# EAGLE board SpectroSlave (EAGLE 7.1.0)
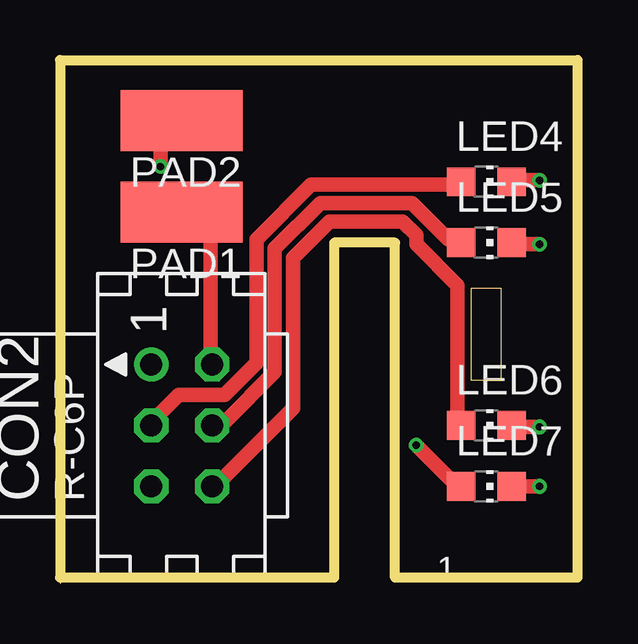
[diagram p0: board, top side]
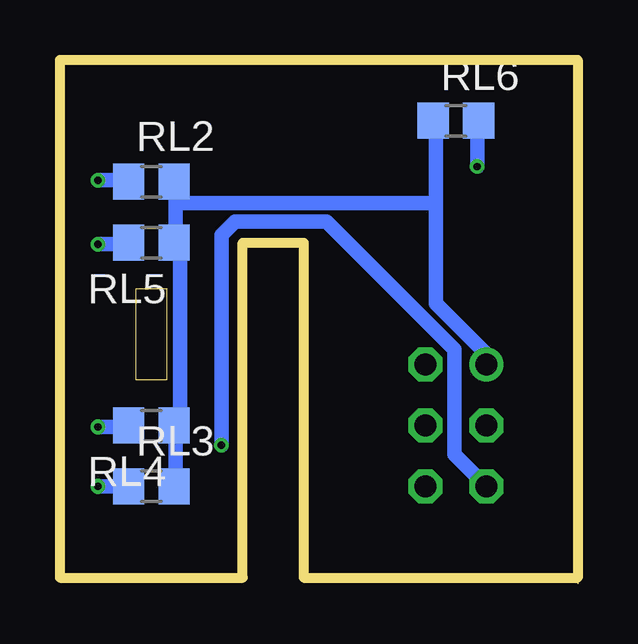
[diagram p1: board, bottom side, seen from below]

Size 21.59 x 21.84 mm. Coordinates in mm from the lower left corner, seen from the top.
Outline: 0,0.25 0,0
Outline: 0,0.25 0,21.84 21.59,21.84 21.59,0.25 13.97,0.25 13.97,14.22 11.43,14.22 11.43,0.25 0,0.25
Copper layers (1*16): Top 0.035mm / dielectric 1.5mm / Bottom 0.035mm
Design rules "Fusion_eagle_rule_v1.1": minimum track width 6mil, minimum drill 12mil, track to track 6mil, track to pad 6mil, pad to pad 6mil, via to via 6mil, smd to smd 0mil, copper to edge 10mil, drill to drill 10mil, minimum pad ring 10mil, minimum via ring 6mil, stop-mask expansion 2mil, vias tented up to drill 100mil, thermal gap 10mil
Net classes: 0 default: width 0.61 mm; 1 power: width 0.61 mm; 2 VIN: width 0.61 mm; 3 fine: width 0.61 mm; 4 aref: width 0.61 mm

## Footprints (pad centres in the part's own frame; a part is rotated, then mirrored left to right if it is on the bottom)
CON06L = drill 0.914: 1 2.54,1.27 | drill 0.914 octagon: 2 2.54,-1.27; 3 0,1.27; 4 0,-1.27; 5 -2.54,1.27; 6 -2.54,-1.27
CHIP-LED0805 = smd 1.2 x 1.2: A 0,-1.05; C 0,1.05
SMD2,54-5,08 = smd 2.54 x 5.08: 1 0,0
R0805 = smd 1.3 x 1.5: 1 -0.95,0; 2 0.95,0

## Placement (x,y rotation side)
CON2  [CON06L]  5.08,6.6 90 top
LED4  BLUE  [CHIP-LED0805]  17.78,16.76 270 top
LED5  WHITE  [CHIP-LED0805]  17.78,14.22 270 top
LED6  GREEN  [CHIP-LED0805]  17.78,6.6 270 top
LED7  RED  [CHIP-LED0805]  17.78,4.06 270 top
PAD1  [SMD2,54-5,08]  5.08,15.49 90 top
PAD2  [SMD2,54-5,08]  5.08,19.3 90 top
RL2  1K  [R0805]  17.78,16.76 0 bottom
RL3  1K  [R0805]  17.78,4.06 0 bottom
RL4  1K  [R0805]  17.78,6.6 180 bottom
RL5  1K  [R0805]  17.78,14.22 180 bottom
RL6  1K  [R0805]  5.08,19.3 0 bottom

## Library data of the parts
CON2 = con-harting; OC_FARNELL: unknown; OC_NEWARK: unknown
LED4-LED7 = led
PAD1 PAD2 = wirepad
RL2-RL6 = rcl

## Nets
GND [power]: CON2.1 RL2.2 RL3.2 RL4.1 RL5.1 RL6.1
N$1: CON2.4 LED5.A
N$2: CON2.6 LED6.A
N$3: LED6.C RL4.2
N$4: CON2.2 PAD1.1
N$5: LED7.C RL3.1
N$6: LED4.C RL2.1
N$7: CON2.3 LED4.A
N$8: PAD2.1 RL6.2
N$9: CON2.5 LED7.A
N$10: LED5.C RL5.2

## Tracks (layer width: path | path; a pad name or v marks a point on that pad's centre or on a via)
GND
  Bottom 0.61: RL3.2 16.76,4.06 16.76,6.54 RL4.1 16.57,6.73 16.57,14.16 RL5.1 16.76,14.35 16.76,15.88 | 16.76,15.88 16.76,16.64 RL2.2 | 5.91,15.88 5.91,11.68 3.81,9.59 CON2.1 | 5.91,15.88 5.91,19.3 RL6.1 | 5.91,15.88 16.76,15.88
N$1
  Top 0.61: LED5.A 16.57,14.35 16.19,14.35 14.67,15.88 10.86,15.88 8.95,13.97 8.95,8.83 6.86,6.73 6.48,6.73 CON2.4
N$2
  Top 0.61: LED6.A 16.57,6.73 16.57,12.45 14.86,14.16 14.86,14.54 14.29,15.11 11.24,15.11 9.72,13.59 9.72,7.3 6.48,4.06 CON2.6
N$3  (via drill 0.3)
  Top 0.61: v20,6.54 18.86,6.54 LED6.C
  Bottom 0.61: v20,6.54 18.86,6.54 RL4.2
N$4
  Top 0.61: CON2.2 6.29,9.21 6.29,14.35 5.14,15.49 PAD1.1
N$5  (via drill 0.3)
  Top 0.61: v20,4.06 LED7.C
  Bottom 0.61: RL3.1 v20,4.06
N$6  (via drill 0.3)
  Top 0.61: v20,16.83 18.86,16.83 LED4.C
  Bottom 0.61: v20,16.83 18.86,16.83 RL2.1
N$7
  Top 0.61: LED4.A 16.57,16.64 10.48,16.64 8.19,14.35 8.19,9.21 6.86,7.87 4.95,7.87 3.81,6.73 CON2.3
N$8  (via drill 0.3)
  Top 0.61: v4.19,17.4 4.19,18.54 4.95,19.3 PAD2.1
  Bottom 0.61: v4.19,17.4 4.19,19.3 RL6.2
N$9  (via drill 0.3)
  Top 0.61: v14.86,5.78 16.57,4.06 LED7.A
  Bottom 0.61: v14.86,5.78 14.86,14.54 14.29,15.11 10.48,15.11 5.14,9.78 5.14,5.4 CON2.5
N$10  (via drill 0.3)
  Top 0.61: v20,14.16 18.86,14.16 LED5.C
  Bottom 0.61: v20,14.16 18.86,14.16 RL5.2

## Text on the board
tNames: 1
203bmp: C:/Users/G/Pictures/logo_epfl.bmp